# Altium PCB MAGI'sOLED.PcbDoc
Units mil, origin at the board's own origin, x right, y up, seen from the top; angles counter-clockwise.
Board outline 6000 x 4000 mil, 2 copper layers (Top Layer, Bottom Layer); 15 components, 22 nets, 96 pads, 15 vias.
Unrouted connection lines stored in the file: 2.
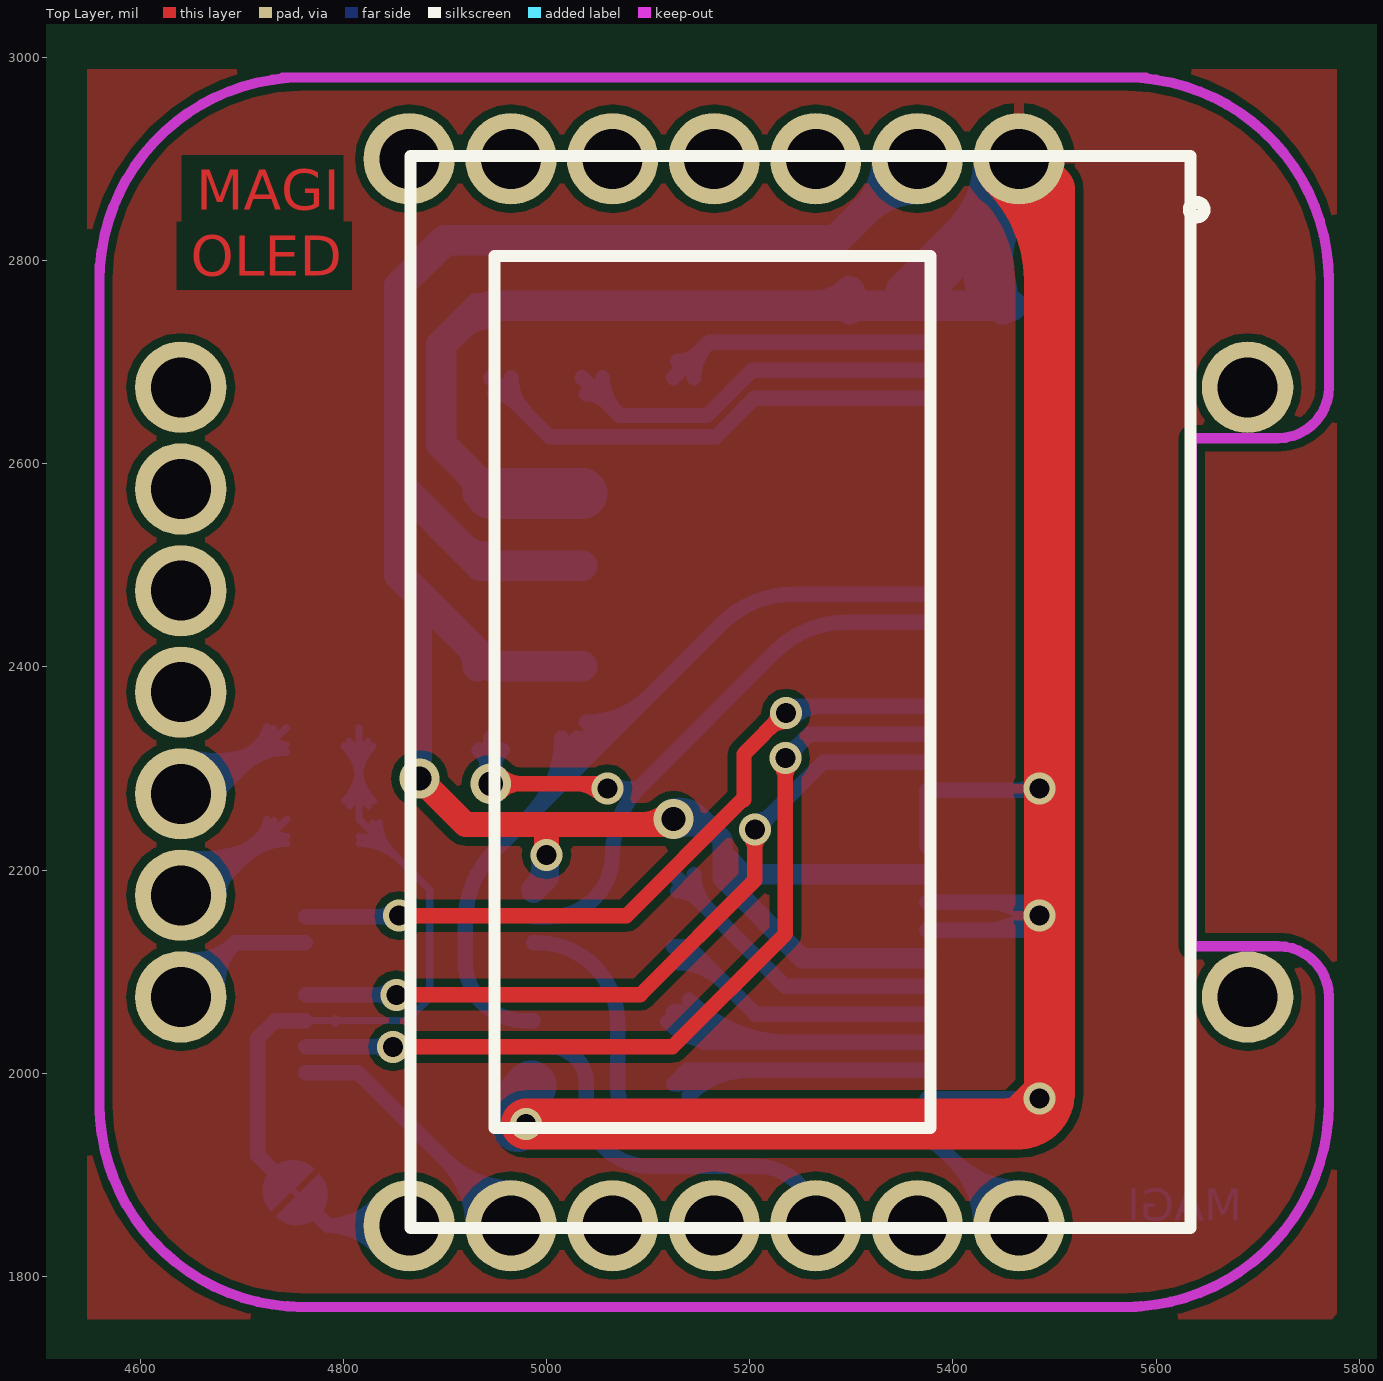
[diagram p0: Top Layer view]
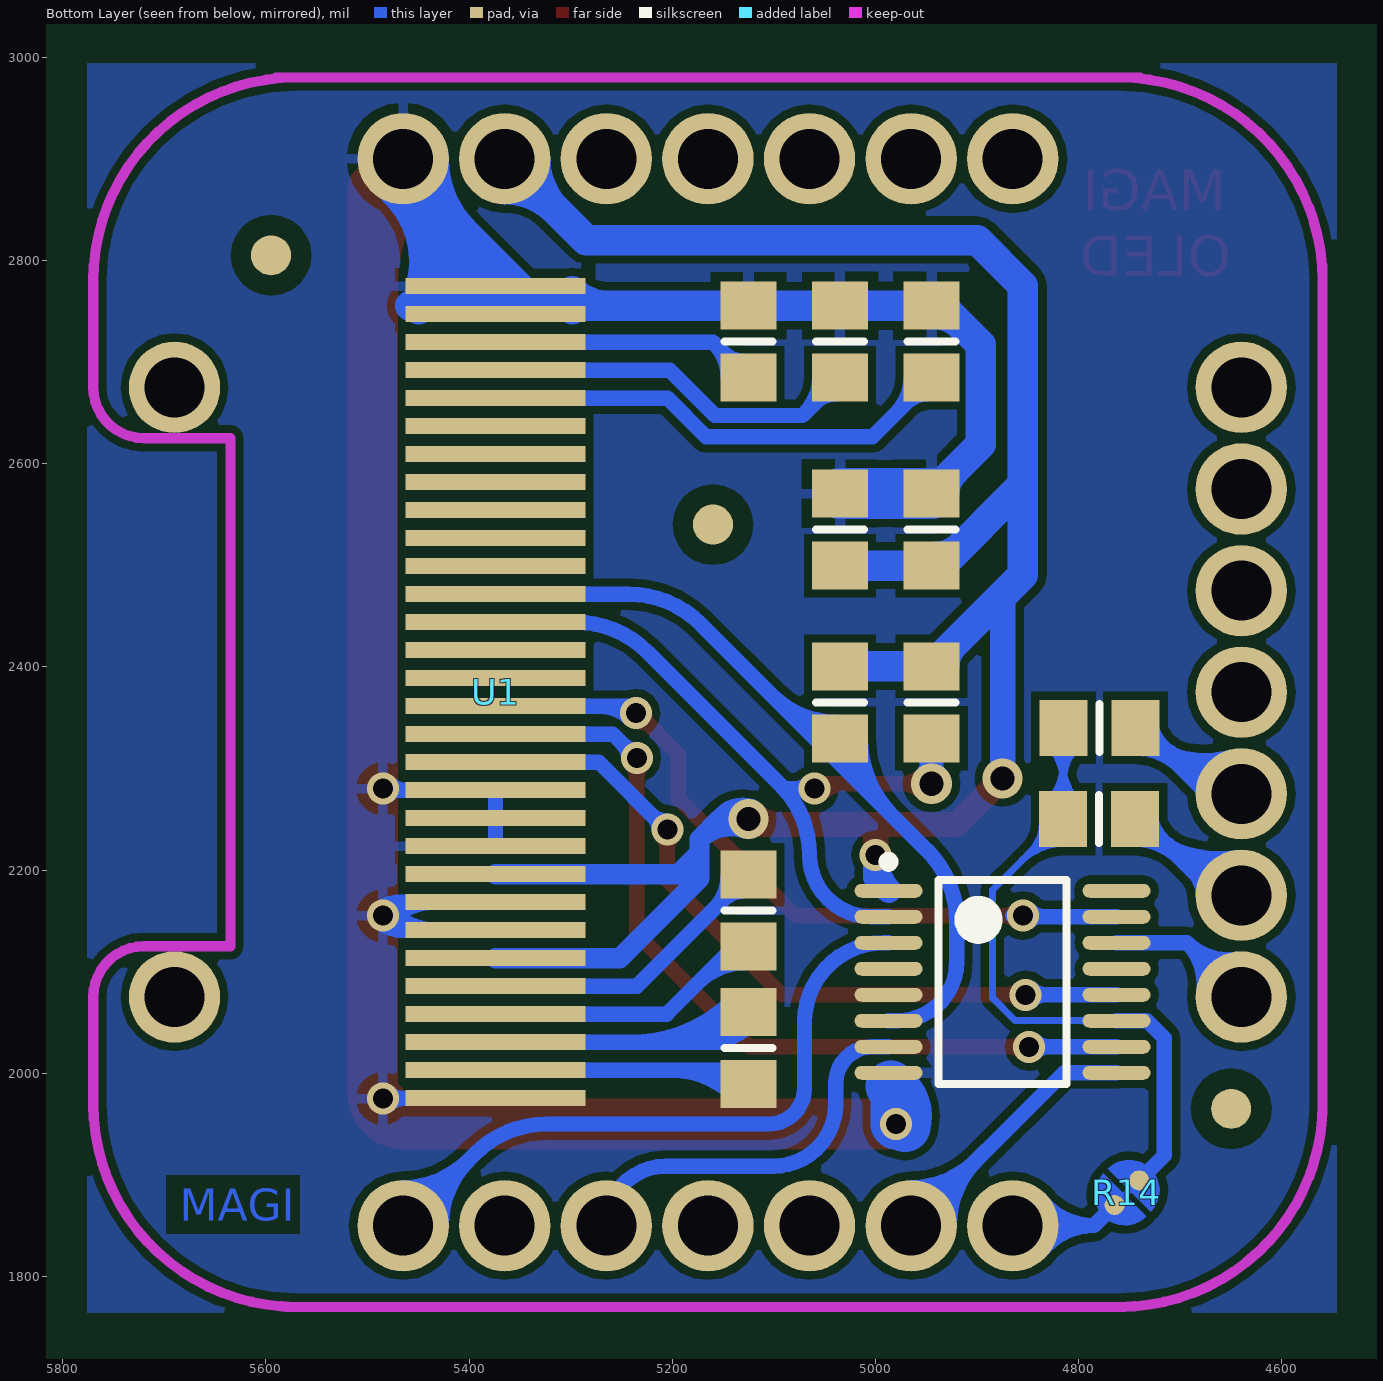
[diagram p1: Bottom Layer view, seen from below]

## Layer stack, top to bottom
Top Solder: solder mask 0.4, Solder Resist, Dk 3.5
Top Layer: signal copper 1.4
Dielectric 1: dielectric 12.6, FR-4, Dk 4.8
Bottom Layer: signal copper 1.4
Bottom Solder: solder mask 0.4, Solder Resist, Dk 3.5

## Board outline
1000,1000 7000,1000 7000,5000 1000,5000

## Design rules (kind name [scope] priority, off if disabled: settings)
Clearance Clearance_1 [InPolygon vs InNet('Mark')] p1: gap=19.68
Clearance Clearance_2 [InPolygon] p2: gap=8
Clearance [All] p3: gap=6
PolygonConnect [All] p1: connectstyle=Relief reliefconductorwidth=10 reliefentries=4 polygonreliefangle="90 Angle" airgapwidth=10
RoutingVias [All] p1: holewidth=28 width=50 viastyle="Through Hole" minholewidth=12 minwidth=24 maxholewidth=280 maxwidth=500
SolderMaskExpansion [All] p1: expansion=4
Width [All] p1: maxlimit=100 minlimit=6 preferedwidth=10
29 further rules are at their usual default settings.

## Components (designator, comment, footprint, x,y, rotation, side; value= is the part's Value field where it differs from the comment)
C1 "0805" 6-0805_N 5125,2025 r90 bottom
C2 "0805" 6-0805_N 5125,2160 r90 bottom
C3 "0805" 6-0805_N 5035,2535 r270 bottom
C4 "0805" 6-0805_N 4945,2535 r270 bottom
C5 "0805" 6-0805_N 5125,2720 r270 bottom
C6 "0805" 6-0805_N 5035,2720 r270 bottom
J1 "MAGI-M8" MAGI-M8 5165,2375 r0 top
R3 "RES1_1" 6-0805_n 4945,2720 r90 bottom
R4 "RES1_1" 6-0805_n 4945,2365 r90 bottom
R5 "RES1_1" 6-0805_n 5035,2365 r90 bottom
R6 "RES1_1" 6-0805_n 4779.57,2340 r0 bottom
R7 "RES1_1" 6-0805_n 4780,2250 r0 bottom
R14 "Jump" Jump 4752.5,1882.5 r45 bottom
U1 "UG0.96" UG0.96 5315,2375 r90 top
U2 "74HC4050" TC74HC4050 4875,2090 r180 bottom

## Footprints (in the part's own frame and the unit in brackets; to place one, negate y for a bottom-side part, rotate by r counter-clockwise, add the part's x,y. Pads: shape width x height; smd on the part's side, far side on the other; paste and mask are expansions set on the pad)
6-0805_N [mm] "Chip Resistor, Body 2.0x1.2mm, IPC Medium Density"
  rect 1.2x1.4 smd: 1(-0.9,0) 2(0.9,0)
  silkscreen extent 0,-0.6 0,0.6, body extent -1.07,-0.7 1.07,0.7, height 0.7
6-0805_n [mm] "Chip Resistor, Body 2.0x1.2mm, IPC Medium Density"
  rect 1.2x1.4 smd: 1(-0.9,0) 2(0.9,0)
  silkscreen extent 0,-0.6 0,0.6, body extent -1.07,-0.7 1.07,0.7, height 0.7
Jump [mm]
  round 0.5 smd: 1(0,0.44) 2(0,-0.43)
  Top Layer region: -0.759,-0.075 -0.683,-0.406 -0.472,-0.671 -0.166,-0.818 0.173,-0.818 0.478,-0.671 0.69,-0.406 0.765,-0.075 0.765,-0.075
  Top Layer region: 0.759,0.077 0.683,0.408 0.472,0.673 0.166,0.82 -0.173,0.82 -0.478,0.673 -0.69,0.408 -0.765,0.077 -0.765,0.077
MAGI-M8 [mil]
  round 90 hole 59.06: 1(300,525) 2(200,525) 3(100,525) 4(0,525) 5(-100,525) 6(-200,525) 7(-300,525) 8(-525,300) 9(-525,200) 10(-525,100) 11(-525,0) 12(-525,-100) 13(-525,-200) 14(-525,-300) 15(-300,-525) 16(-200,-525) 17(-100,-525) 18(0,-525) 19(100,-525) 20(200,-525) 21(300,-525) 22(525,-300) 28(525,300)
  Keep-Out Layer lines w10: -605,-415 -605,290 -605,420 ; -605,-405 ccw(c-405,-405) -405,-605 ; -605,405 cw(c-405,405) -405,605 ; -425,605 425,605 ; -410,-605 415,-605 ; 405,-605 ccw(c405,-405) 605,-405 ; 405,605 cw(c405,405) 605,405
  silkscreen extent 468,468 482,482
TC74HC4050 [mm]
  oval 1.7x0.35 smd: 1(-2.85,2.275) 2(-2.85,1.625) 3(-2.85,0.975) 4(-2.85,0.325) 5(-2.85,-0.325) 6(-2.85,-0.975) 7(-2.85,-1.625) 8(-2.85,-2.275) 9(2.85,-2.275) 10(2.85,-1.625) 11(2.85,-0.975) 12(2.85,-0.325) 13(2.85,0.325) 14(2.85,0.975) 15(2.85,1.625) 16(2.85,2.275)
  silkscreen extent -2.98,-2.55 1.6,3.12, body extent -2.25,-2.55 2.25,2.55, height 1.2
UG0.96 [mm]
  rect 0.4x4.5 smd far side: 1(-10.15,-1.5) 2(-9.45,-1.5) 3(-8.75,-1.5) 4(-8.05,-1.5) 5(-7.35,-1.5) 6(-6.65,-1.5) 7(-5.95,-1.5) 8(-5.25,-1.5) 9(-4.55,-1.5) 10(-3.85,-1.5) 11(-3.15,-1.5) 12(-2.45,-1.5) 13(-1.75,-1.5) 14(-1.05,-1.5) 15(-0.35,-1.5) 16(0.35,-1.5) 17(1.05,-1.5) 18(1.75,-1.5) 19(2.45,-1.5) 20(3.15,-1.5) 21(3.85,-1.5) 22(4.55,-1.5) 23(5.25,-1.5) 24(5.95,-1.5) 25(6.65,-1.5) 26(7.35,-1.5) 27(8.05,-1.5) 28(8.75,-1.5) 29(9.45,-1.5) 30(10.15,-1.5)
  silkscreen extent -13.4,-8.1 13.4,11.4

## Part data
C1 C2 C3 C4 C5 C6: library part CAP_1, "Capacitor"
R14: library part RES1_1

## Free pads (board coordinates)
  round 39.37 smd far side paste-39.37 mask+19.68: 0(4650,1965) 0(5160,2540) 0(5595,2805)

## Via types
v1: diameter 31.5, hole 19.68, Top Layer to Bottom Layer, tented both sides, 12 vias
v2: diameter 39.37, hole 23.62, Top Layer to Bottom Layer, tented both sides, 2 vias
v3: diameter 40, hole 24, Top Layer to Bottom Layer, tented both sides, 1 vias

## Nets (pads, with @x,y where several pads share a name; then routed paths per layer and width w, separated by ;. In a path a pad name is that pad's centre, name@x,y a point inside that pad or via, vN(x,y) a via of type N, cw(c..) or ccw(c..) an arc to the next point about the centre after c; other vN are vias at no path point)
3.3V: C3.2 C4.2 J1.2 R4.2 R5.2 U1.6 U1.9 U2.1 | length 2677.7
  Top Layer w25: v2(4875,2290) 4920.22,2244.78 5000,2244.78 ; v1(5000,2215) 5000,2244.78 ; 5095.06,2244.78 ccw(c5095.06,2279.94) v2@5119.92,2255.08 ; v2@5121.49,2244.78 5000,2244.78
  Bottom Layer w15: U2.1 U2.1@4987.41,2179.77
  Bottom Layer w20: v2@5121.66,2259.76 cw(c5130.75,2233.23) 5150.58,2253.06 ; v2(5125,2250) 5153.64,2250 5173.25,2230.39 ; v2@5128.14,2240.84 cw(c5142.32,2199.45) 5173.25,2230.39 ; v2@5131.85,2243.15 cw(c5148.38,2226.62) 5148.38,2250 cw(c5148.38,2273.38) v2@5131.85,2256.85 ; 5173.25,2216.75 5194.13,2195.87 U1.9 ; U1.6 5251.81,2113.19 5173.25,2191.75 5173.25,2230.39
  Bottom Layer w25: v2(4875,2290) 4875,2470.43 ; v1@4996.84,2214.24 cw(c4961.48,2205.7) 4987.21,2179.98 5000,2192.77 v1(5000,2215)
  Bottom Layer w30: 4915.97,2518.58 ccw(c4941.06,2543.67) C4.2@4941.06,2508.19 ; R4.2@4923.56,2421.87 cw(c4902.12,2400.43) R4.2@4932.44,2400.43 ; R5.2 R4.2 4875,2470.43 4855,2490.43 4855,2579.55 ; C3.2 C4.2 4934.99,2499.57 4855,2579.55 ; J1.2@5335,2900 cw(c5262.57,2900) 5313.79,2848.79 cw(c5365,2797.57) J1.2@5365,2870 ; J1.2 5285,2820 4900,2820 4855,2775 4855,2579.55
C1N: C2.2 U1.5 | length 355.7
  Bottom Layer w15: C2.2 5234.8,2085.63 U1.5 ; C2.2@5128.94,2179.31 cw(c5128.94,2149.89) 5149.74,2170.7 ; C2.2@5145.06,2195.43 ccw(c5193.49,2195.43) 5159.24,2161.19
C1P: C2.1 U1.4 | length 326.3
  Bottom Layer w15: C2.1 5139.05,2124.57 5205.54,2058.07 U1.4 ; C2.1@5128.94,2108.45 cw(c5128.94,2045.11) 5173.72,2089.9
C2N: C1.2 U1.3 | length 562.6
  Bottom Layer w15: C1.2@5119.12,2050.62 ccw(c5167.67,2099.17) 5167.67,2030.51 ; C1.2 5154.92,2030.51 ; C1.2@5128.94,2044.31 cw(c5128.94,2014.89) 5149.74,2035.7 ; C1.2@5129.73,2061.23 ccw(c5203.88,2135.38) 5203.88,2030.51 ; C1.2@5140.34,2071.83 ccw(c5240.1,2171.59) 5240.1,2030.51 ; C1.2@5144.97,2058.71 ccw(c5179.43,2055.02) 5154.92,2030.51 ; U1.3 5154.92,2030.51
C2P: C1.1 U1.2 | length 359.1
  Bottom Layer w15: C1.1 5138.39,2002.95 U1.2 ; C1.1@5129.73,1988.77 cw(c5163.96,1954.54) 5163.96,2002.95 ; C1.1@5140.34,1978.17 cw(c5200.18,1918.33) 5200.18,2002.95
CS: J1.15 R6.2 R7.2 R14.1 R14.2 U2.11 | length 1403.2
  Bottom Layer w6: R14.2@4740.53,1887.63 cw(c4740.53,1871.11) 4752.21,1882.79 cw(c4763.89,1894.47) R14.2@4747.37,1894.47 ; R14.2@4745,1890 R14.1@4760,1875 ; R14.1@4757.91,1870.25 ccw(c4741.39,1870.25) 4753.07,1881.93 ccw(c4764.75,1893.61) R14.1@4764.75,1877.09
  Bottom Layer w7: U2.11 4763.14,2051.96 4862.66,2051.96 4885,2074.29 4885,2180.43 R7.2 4815.43,2339.57 R6.2 ; U2.11@4791.77,2049.22 cw(c4798.38,2042.6) 4798.38,2051.96 ; U2.11@4791.77,2054.01 ccw(c4796.73,2058.97) 4796.73,2051.96 ; R6.2@4800.77,2321.83 cw(c4765.38,2286.44) 4815.43,2286.44 ; R7.2@4801.2,2268.17 ccw(c4766.85,2302.52) 4815.43,2302.52 ccw(c4864.01,2302.52) R7.2@4829.66,2268.17 ; R6.2@4805.72,2326.78 cw(c4782.28,2303.34) 4815.43,2303.34 ; R7.2@4806.15,2263.22 ccw(c4783.75,2285.62) 4815.43,2285.62 ccw(c4847.11,2285.62) R7.2@4824.71,2263.22 ; R7.2@4815.43,2225.94 cw(c4815.43,2167.86) 4856.5,2208.93 ; R7.2@4815.43,2232.94 cw(c4815.43,2191.76) 4844.55,2220.88 ; 4815.43,2288.53 cw(c4862.53,2288.53) R6.2@4829.23,2321.83 ; 4815.43,2305.43 cw(c4845.63,2305.43) R6.2@4824.28,2326.78 ; R7.2@4828.56,2246.06 ccw(c4850.73,2246.06) R7.2@4835.05,2230.38 ; R7.2@4835.56,2246.06 ccw(c4874.63,2246.06) 4847,2218.43
  Bottom Layer w15: R14.2@4745,1890 4715.83,1919.17 4715.83,2034.47 4732.98,2051.61 U2.11 ; R14.1@4760,1875 4785,1850 ; J1.15@4836.18,1826.01 ccw(c4785,1783.43) 4785,1850 ; J1.15@4836.18,1873.99 cw(c4785,1916.57) 4785,1850 ; J1.15@4847.71,1835.61 ccw(c4817,1810.06) 4817,1850 ccw(c4817,1889.94) J1.15@4847.71,1864.39 ; J1.15 4785,1850
CS.3: U1.13 U2.12 | length 860.5
  Top Layer w15: v1(4852.2,2077.2) 5092.2,2077.2 5205,2190 v1(5205,2240) ; v1@4858.04,2071.37 cw(c4872.12,2057.29) 4872.12,2077.2 cw(c4872.12,2097.12) v1@4858.04,2083.04 ; v1@5199.17,2234.17 cw(c5185.09,2220.09) 5205,2220.09 cw(c5224.91,2220.09) v1@5210.83,2234.17
  Bottom Layer w15: U2.12 v1(4852.2,2077.2) ; v1@4846.37,2071.37 ccw(c4832.29,2057.29) 4832.29,2077.2 ccw(c4832.29,2097.12) v1@4846.37,2083.04 ; v1(5205,2240) 5206.36,2240 5272.47,2306.1 U1.13 ; v1@5205,2248.25 ccw(c5205,2271.45) 5221.41,2255.04 ; v1@5213.25,2240 cw(c5229.87,2240) 5218.12,2251.75
D0: J1.21 U2.3 | length 872.2
  Bottom Layer w15: U2.3 4991.61,2128.39 cw(c4991.61,2050) 5070,2050 5070,1985 ccw(c5105,1985) 5105,1950 5323.58,1950 cw(c5323.58,1850) 5394.29,1920.71 J1.21 ; J1.21@5427.5,1850 ccw(c5336.97,1850) 5400.98,1914.02 ccw(c5465,1978.03) J1.21@5465,1887.5 ; J1.21@5442.5,1850 ccw(c5388.18,1850) 5426.59,1888.41 ccw(c5465,1926.82) J1.21@5465,1872.5
D0.3: R4.1 U1.18 U2.2 | length 1009.4
  Top Layer w15: v3(4945,2285) 5055,2285 v1(5060,2280) ; v3@4953.84,2276.16 cw(c4975.18,2254.82) 4975.18,2285 cw(c4975.18,2315.18) v3@4953.84,2293.84 ; 5028.02,2285 cw(c5028.02,2248.02) v1@5054.17,2274.17
  Bottom Layer w15: R4.1@4933.6,2318.17 cw(c4906.08,2290.65) 4945,2290.65 cw(c4983.92,2290.64) R4.1@4956.4,2318.17 ; v3@4936.16,2293.84 ccw(c4914.82,2315.18) 4945,2315.18 ccw(c4975.18,2315.18) v3@4953.84,2293.84 ; v3@4936.53,2294.2 ccw(c4927.36,2304.16) 4940.44,2307.66 ccw(c4956.98,2312.09) v3@4950.06,2296.43 ; v3@4939.94,2296.43 ccw(c4933.02,2312.09) 4949.56,2307.66 ccw(c4962.64,2304.16) v3@4953.47,2294.2 ; v3@4945,2275 v3(4945,2285) R4.1 ; U2.2 5003.98,2153.98 ccw(c5003.98,2215) 5065,2215 cw(c5161.57,2215) 5093.21,2283.21 cw(c5161.57,2215) 5093.28,2283.28 5224.61,2414.61 cw(c5295.32,2343.9) 5295.32,2443.9 U1.18 ; v1(5060,2280) 5090,2280 ; v1@5065.83,2274.17 cw(c5079.91,2260.09) 5079.91,2280 cw(c5079.91,2299.91) v1@5065.83,2285.83
D1: J1.19 U2.7 | length 386.9
  Bottom Layer w15: U2.7 5003.15,2026.02 cw(c5003.15,1990) 5039.17,1990 5039.17,1970 ccw(c5100.67,1970) 5050.33,1934.67 ccw(c5100.67,1970) 5065.34,1919.66 ccw(c5100.67,1970) 5100.67,1908.5 5206.5,1908.5 cw(c5206.5,1850) J1.19
D1.3: R5.1 U1.19 U2.6 | length 1022
  Bottom Layer w15: 4983.39,2253.39 ccw(c4907.2,2329.57) R5.1@5014.94,2329.57 ; U2.6 4978.39,2051.61 cw(c4978.39,2110) 4920,2110 4920,2148.58 cw(c5020,2148.58) 4949.29,2219.29 5172.17,2442.17 cw(c5242.88,2371.46) 5242.88,2471.46 U1.19 ; 5008.99,2278.99 ccw(c4958.42,2329.57) R5.1@5029.94,2329.57 ; 5034.6,2304.6 ccw(c5009.63,2329.57) R5.1@5044.94,2329.57 ; R5.1@5038.94,2330.69 ccw(c5038.94,2383.2) 5076.07,2346.07 ; R5.1@5038.94,2345.69 ccw(c5038.94,2434.42) 5101.68,2371.68
D4: J1.12 R6.1 | length 1168.2
  Bottom Layer w7: J1.12@4639.87,2274.52 ccw(c4654.11,2327.33) 4692.78,2288.65 ; J1.12 4679.13,2275 R6.1 cw(c4675.92,2408.21) J1.12@4650.8,2315.07 ; J1.12@4641.69,2281.28 ccw(c4657.74,2340.81) 4701.34,2297.21 ; J1.12@4643.51,2288.03 ccw(c4661.38,2354.29) 4709.9,2305.77 ; J1.12@4645.34,2294.79 ccw(c4665.01,2367.77) 4718.46,2314.32 ; J1.12@4647.16,2301.55 ccw(c4668.65,2381.25) R6.1@4727.01,2322.88 ; J1.12@4648.98,2308.31 ccw(c4672.28,2394.73) R6.1@4735.57,2331.44 ; 4701.62,2310.24 cw(c4728.05,2267.92) R6.1@4739.51,2316.48 ; 4702.56,2306 ccw(c4672.79,2349.13) R6.1@4724.34,2339.69 ; 4702.59,2316.01 cw(c4720.9,2284.31) R6.1@4735.89,2317.71 ; 4703.06,2298.93 cw(c4744.13,2257.86) R6.1@4744.13,2315.94 ; 4703.86,2311.63 ccw(c4679.23,2351.07) R6.1@4724.53,2340.6 ; 4707.02,2309.08 cw(c4732.45,2272.26) R6.1@4740.51,2316.27 ; 4707.48,2318.84 ccw(c4689.01,2350.83) R6.1@4724.7,2341.27 ; 4712.57,2308.43 ccw(c4684.94,2336.06) R6.1@4724.01,2336.06 ; 4714.44,2322.86 cw(c4727.81,2299.71) R6.1@4738.76,2324.09 ; 4715.01,2310.88 cw(c4744.13,2281.76) R6.1@4744.13,2322.94 ; 4715.87,2319.13 cw(c4733.48,2290.92) R6.1@4741.12,2323.29 ; 4716.47,2315.6 ccw(c4696.3,2344.83) R6.1@4731.23,2338.43 ; 4718.19,2320.59 ccw(c4702.52,2345.68) R6.1@4731.35,2339.02 ; R6.1@4720.93,2318.68 cw(c4736.75,2295.76) R6.1@4741.77,2323.16 ; R6.1@4722.12,2327.29 ccw(c4712.1,2344.65) R6.1@4731.46,2339.46 ; R6.1@4724.52,2320.38 ccw(c4708.84,2336.06) R6.1@4731.01,2336.06
D5: J1.13 R7.1 | length 1193.5
  Bottom Layer w7: J1.13@4639.94,2174.5 ccw(c4646.71,2227.01) 4684.14,2189.57 ; J1.13 4669.57,2175 R7.1 cw(c4660.52,2334.04) J1.13@4645.31,2216.16 ; J1.13@4640.83,2181.45 ccw(c4649.01,2244.85) 4694.21,2199.64 ; J1.13@4641.73,2188.39 ccw(c4651.31,2262.69) 4704.28,2209.71 ; J1.13@4642.62,2195.33 ccw(c4653.61,2280.53) 4714.35,2219.79 ; J1.13@4643.52,2202.27 ccw(c4655.91,2298.37) R7.1@4724.42,2229.86 ; J1.13@4644.41,2209.22 ccw(c4658.21,2316.2) R7.1@4734.49,2239.93 ; J1.13@4681.5,2175 cw(c4710.31,2175) 4689.94,2195.37 ; 4702.87,2218.07 cw(c4731.81,2176.2) R7.1@4740.95,2226.27 ; 4703,2223.38 cw(c4724.15,2190.37) R7.1@4737.64,2227.17 ; 4703.5,2208.93 cw(c4744.57,2167.86) R7.1@4744.57,2225.94 ; 4705.08,2215.09 ccw(c4674.23,2255.51) R7.1@4724.62,2248.74 ; 4705.57,2219.93 ccw(c4679.27,2257.99) R7.1@4724.77,2249.68 ; 4707.62,2217.04 cw(c4735.72,2180.22) R7.1@4741.89,2226.12 ; 4708.61,2226.97 ccw(c4688.51,2258.35) R7.1@4724.91,2250.37 ; 4713,2218.43 ccw(c4685.37,2246.06) R7.1@4724.44,2246.06 ; 4714.88,2230.99 cw(c4730.25,2207) R7.1@4740.05,2233.74 ; 4715.45,2220.88 cw(c4744.57,2191.76) R7.1@4744.57,2232.94 ; 4716.77,2227.68 cw(c4736.1,2199.71) R7.1@4742.21,2233.15 ; 4718.51,2225.35 ccw(c4697.92,2252.33) R7.1@4731.56,2247.81 ; 4719.47,2229.54 ccw(c4702.78,2253.69) R7.1@4731.66,2248.42 ; R7.1@4721.06,2227.29 cw(c4738.9,2203.91) R7.1@4742.82,2233.06 ; R7.1@4722.84,2236.08 ccw(c4711.86,2253.23) R7.1@4731.75,2248.87 ; R7.1@4724.95,2230.38 ccw(c4709.27,2246.06) R7.1@4731.45,2246.06
DC: J1.14 U2.14 | length 313.8
  Bottom Layer w15: J1.14 4693.39,2128.39 ; J1.14@4643.06,2097.29 ccw(c4647.74,2131.32) 4672.03,2107.03 ccw(c4696.32,2082.74) J1.14@4662.29,2078.06 ; J1.14@4645.11,2112.15 ccw(c4652.91,2168.86) 4693.38,2128.38 ; J1.14@4677.15,2080.11 cw(c4733.86,2087.91) 4693.38,2128.38 ; U2.14 4693.39,2128.39
DC.3: U1.15 U2.15 | length 871.4
  Top Layer w15: v1(4855,2155) 5078.64,2155 5192.89,2269.25 5194.25,2269.25 5194.25,2314.25 5234.35,2354.35 v1(5235.72,2354.35) ; v1@4860.83,2149.17 cw(c4874.91,2135.09) 4874.91,2155 cw(c4874.91,2174.91) v1@4860.83,2160.83 ; 5219.31,2339.31 cw(c5235.72,2322.9) v1@5235.72,2346.11 ; 5222.6,2342.6 ccw(c5210.85,2354.35) v1@5227.47,2354.35
  Bottom Layer w15: U2.15 4863.98,2153.98 4865,2155 v1(4855,2155) ; 4832.62,2153.98 ccw(c4832.62,2177.38) v1@4849.17,2160.83 ; 4837.56,2153.98 cw(c4837.56,2137.56) v1@4849.17,2149.17 ; v1(5235.72,2354.35) 5237.99,2354.35 5244.86,2361.22 U1.15 ; v1@5241.55,2348.52 cw(c5272.21,2317.86) 5272.21,2361.22
GND: C3.1 C4.1 C5.1 C6.1 J1.1 R3.2 U1.1 U1.7 U1.8 U1.10 U1.11 U1.12 U1.29 U1.30 U2.8 | length 3813.5
  Top Layer w50: v1(4980,1950) 5465,1950 ; 5446.98,1950 ccw(c5446.98,2013.02) v1@5491.54,1968.46 ; J1.1@5450.86,2885.86 cw(c5344.29,2779.29) 5495,2779.29 ; J1.1 5495,2870 5495,1980 5465,1950 ; v1@5493.99,1972.83 cw(c5465,1979.83) 5465,1950
  Bottom Layer w15: U1.7 5470.75,2140.75 v1(5485,2155) 5471.69,2168.31 U1.8 ; U1.10 U1.11 U1.12 5483.54,2278.54 v1(5485,2280) ; U1.1@5374.45,1975 v1(5485,1975) ; U1.7@5430.68,2140.75 ccw(c5430.68,2209.32) v1@5479.17,2160.83 ; U1.8@5432.96,2168.31 cw(c5432.96,2102.96) v1@5479.17,2149.17 ; U1.12@5461.57,2278.54 ccw(c5461.57,2303.43) v1@5479.17,2285.83 ; 5466.89,2140.75 ccw(c5466.89,2173.11) v1@5489.77,2150.23 ; 5468.6,2278.54 cw(c5468.6,2263.6) v1@5479.17,2274.17 ; 5469.17,2168.31 cw(c5469.17,2139.17) v1@5489.77,2159.77 ; v1@5479.17,1969.17 ccw(c5465.09,1955.09) 5465.09,1975 ccw(c5465.09,1994.91) v1@5479.17,1980.83
  Bottom Layer w30: 4915.97,2736.42 cw(c4941.06,2711.33) R3.2@4941.06,2746.81 ; C4.1@4923.56,2591.87 cw(c4902.12,2570.43) C4.1@4932.44,2570.43 ; R3.2@4932.28,2752.72 4896.44,2716.89 4896.44,2618.99 C4.1 ; R3.2 C5.1 5445.43,2755.43 5450,2760 ; 5264.26,2755.43 ccw(c5264.26,2803.69) U1.30@5298.39,2769.57 ; 5290.31,2755.43 cw(c5290.31,2744.01) U1.29@5298.39,2752.09 ; U1.29@5449.72,2752.09 cw(c5457.81,2744.01) 5457.81,2755.43
  Bottom Layer w50: C4.1 C3.1 ; v1@4970.77,1949.33 cw(c5019.65,1952.87) 4985,1987.52 4980,1982.52 ; v1@4971.14,1947.34 cw(c5005,1957.52) 4980,1982.52 ; v1(4980,1950) 4980,1982.52 ; 5358.32,2766.68 J1.1@5465,2873.36 ; 5412.02,2820.38 ccw(c5332.41,2900) J1.1@5445,2900 ; U1.30@5438.31,2769.86 cw(c5539.37,2798.99) J1.1@5465,2873.36 ; J1.1 J1.1@5465,2873.36
IREF: R3.1 U1.26 | length 530
  Bottom Layer w15: R3.1 5003.12,2626.44 5166.85,2626.44 5204.77,2664.37 U1.26 ; R3.1@4948.94,2668.44 cw(c4948.94,2639.03) 4969.74,2659.83 ; R3.1@4965.06,2684.57 ccw(c5013.49,2684.57) 4979.24,2650.32
Mark: pad.0
RES: J1.16 U2.9 | length 492.1
  Bottom Layer w15: U2.9 4814.57,2000.43 J1.16 ; J1.16@4927.5,1850 ccw(c4836.97,1850) 4900.98,1914.02 ccw(c4965,1978.03) J1.16@4965,1887.5 ; J1.16@4942.5,1850 ccw(c4888.18,1850) 4926.59,1888.41 ccw(c4965,1926.82) J1.16@4965,1872.5
RES.3: U1.14 U2.10 | length 965.1
  Top Layer w15: v1(4848.98,2026.02) 5123.98,2026.02 5235,2137.05 v1(5235,2310) ; v1@4854.81,2020.19 cw(c4868.89,2006.11) 4868.89,2026.02 cw(c4868.89,2045.94) v1@4854.81,2031.86 ; v1@5229.17,2304.17 cw(c5215.09,2290.09) 5235,2290.09 cw(c5254.91,2290.09) v1@5240.83,2304.17
  Bottom Layer w15: U2.10 v1(4848.98,2026.02) ; v1@4843.14,2020.19 ccw(c4829.06,2006.11) 4829.06,2026.02 ccw(c4829.06,2045.94) v1@4843.14,2031.86 ; v1(5235,2310) 5258.66,2333.66 U1.14 ; v1@5235,2318.25 ccw(c5235,2338.16) 5249.08,2324.08 ccw(c5263.16,2310) v1@5243.25,2310
VCC: C5.2 U1.28 | length 324.7
  Bottom Layer w15: C5.2 5159.92,2719.49 U1.28 ; C5.2@5128.94,2700.69 ccw(c5128.94,2730.11) 5149.74,2709.3 ; C5.2@5145.06,2684.57 cw(c5193.49,2684.57) 5159.24,2718.81
VCOMH: C6.2 U1.27 | length 434
  Bottom Layer w15: C6.2 5072.12,2647.44 5158.15,2647.44 5202.64,2691.93 U1.27 ; C6.2@5038.94,2668.44 cw(c5038.94,2639.03) 5059.74,2659.83 ; C6.2@5055.06,2684.57 ccw(c5103.49,2684.57) 5069.24,2650.32
pads on no net: J1.3 J1.4 J1.5 J1.6 J1.7 J1.8 J1.9 J1.10 J1.11 J1.17 J1.18 J1.20 J1.22 J1.28 U1.16 U1.17 U1.20 U1.21 U1.22 U1.23 U1.24 U1.25 U2.4 U2.5 U2.13 U2.16

## Polygon pours and split planes (outlines as drawn)
GND on Top Layer "Bottom Layer-No Net" (solid, pour order 2): 4547.96,2988.03 5777.96,2988.03 5777.96,1763.03 5772.96,1758.03 4547.96,1758.03
GND on Bottom Layer "Bottom Layer-No Net" (solid, pour order 4): 4545.89,2994.14 5775.89,2994.14 5775.89,1764.14 4545.89,1764.14

## Keep-outs
Keep-Out Layer:
  lines w10: 5770,1970 5770,2075 ccw(c5720,2075) 5720,2125 5690,2125 5635,2125 5635,2625 5685,2625 5720,2625 ccw(c5720,2675) 5770,2675 5770,2780

## Other copper
Top Layer:
  text "MAGI" at 4655,2850 h39.37
  text "OLED" at 4650,2785 h39.37

## Silkscreen, mask and mechanical layers (free items; w line width, h text height)
Bottom Solder:
  lines w15: 4745,1890 4760,1875

## Text inside footprints (layer, text, board x,y; h text height)
J1: Bottom Layer "MAGI" at 5685,1855 h31.5